# EAGLE board KramerMC_BUS_ferryTALE2022_v1.0 (EAGLE 6.6.0)
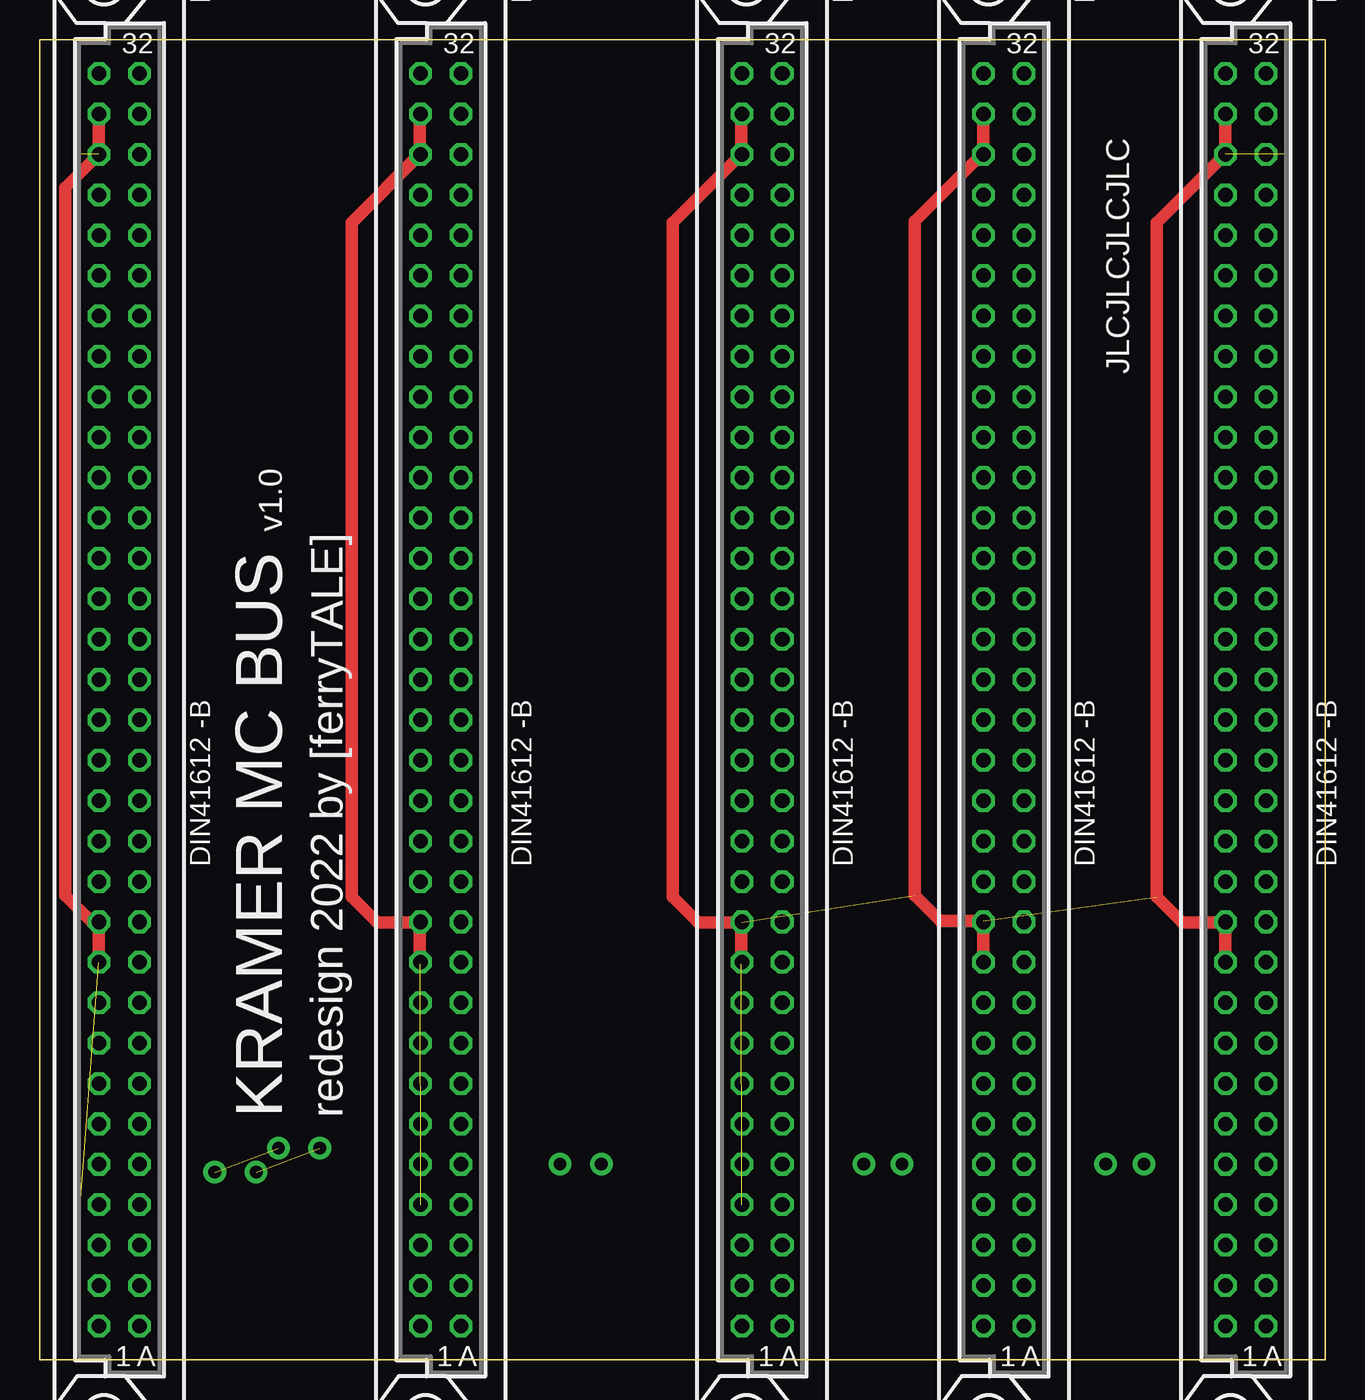
[diagram p0: board, top side]
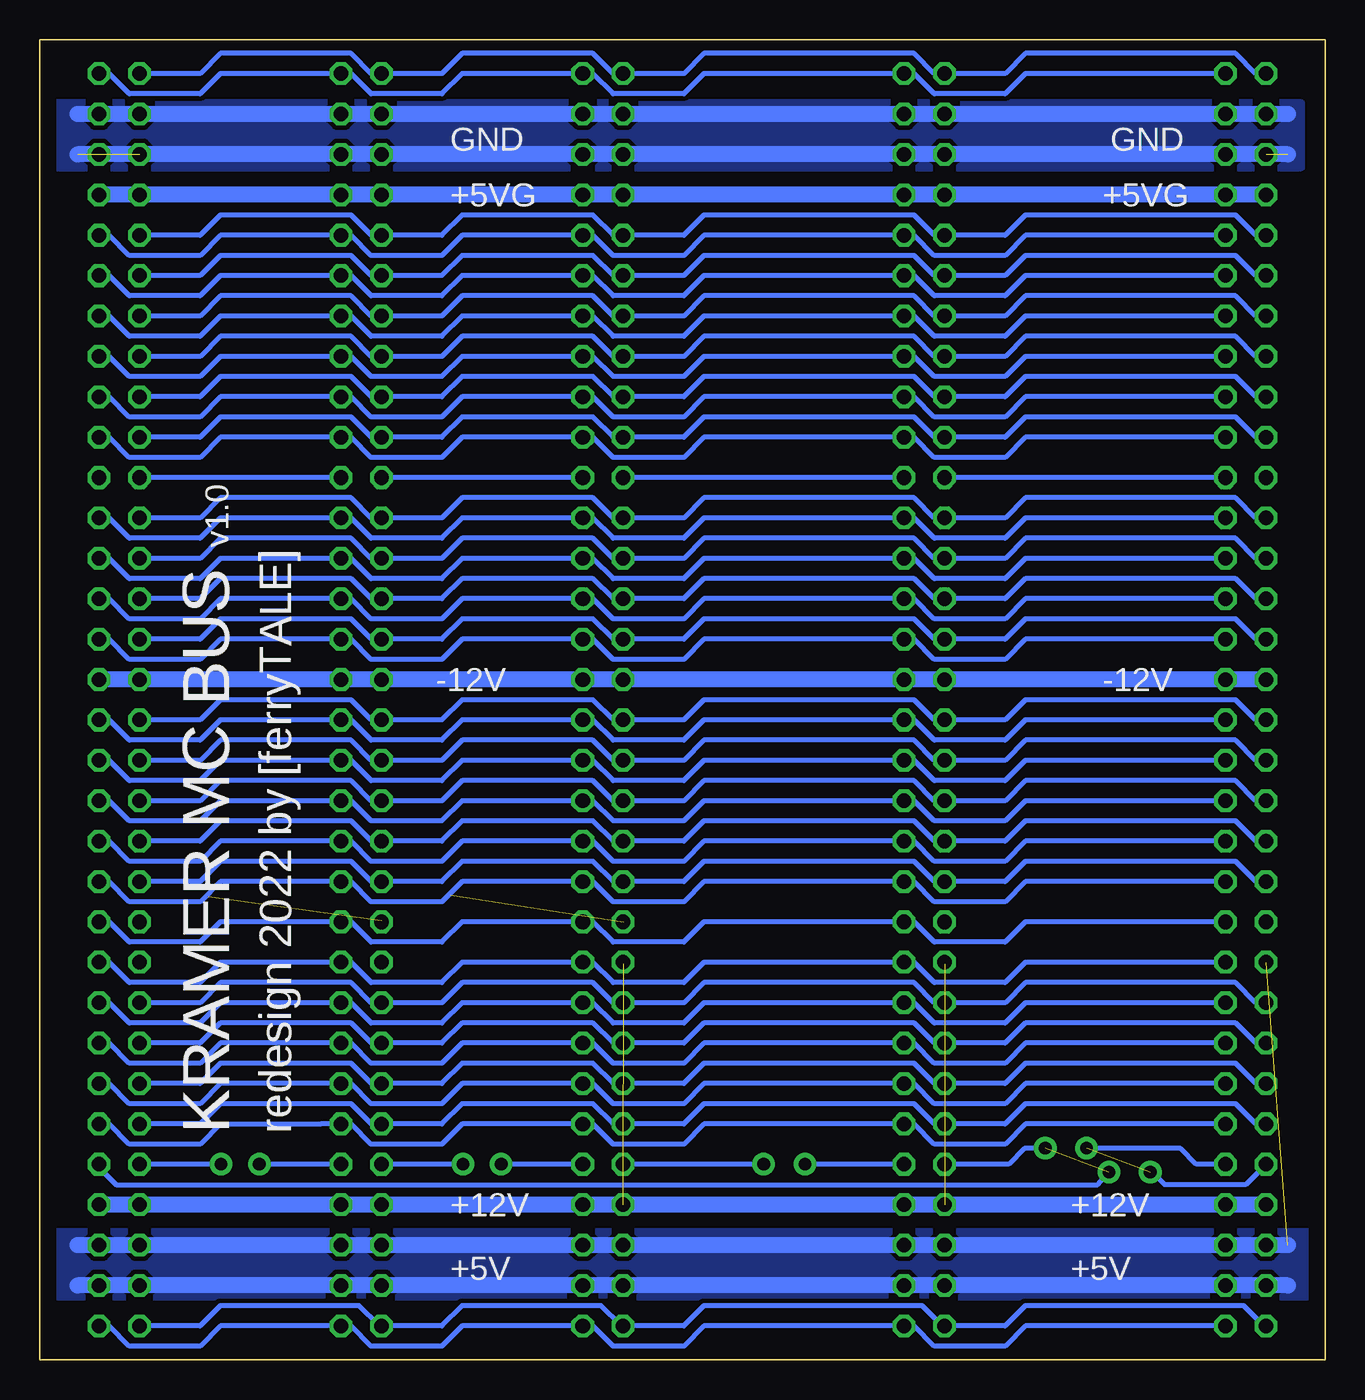
[diagram p1: board, bottom side, seen from below]

Size 80.8 x 83 mm. Coordinates in mm from the lower left corner, seen from the top.
Outline: 0,0 80.8,0 80.8,83 0,83 0,0
Copper layers (1*16): Top 0.035mm / dielectric 1.5mm / Bottom 0.035mm
Design rules "default *": minimum track width 10mil, minimum drill 24mil, track to track 8mil, track to pad 8mil, pad to pad 8mil, via to via 8mil, smd to smd 8mil, copper to edge 40mil, drill to drill 8mil, minimum pad ring 10mil, minimum via ring 8mil, stop-mask expansion 4mil, vias tented up to drill 0mil, thermal gap 10mil

## Footprints (pad centres in the part's own frame; a part is rotated, then mirrored left to right if it is on the bottom)
FAB64S-NOHOLE = drill 0.914 octagon: A1 39.37,1.27; A2 36.83,1.27; A3 34.29,1.27; A4 31.75,1.27; A5 29.21,1.27; A6 26.67,1.27; A7 24.13,1.27; A8 21.59,1.27; A9 19.05,1.27; A10 16.51,1.27; A11 13.97,1.27; A12 11.43,1.27; A13 8.89,1.27; A14 6.35,1.27; A15 3.81,1.27; A16 1.27,1.27; A17 -1.27,1.27; A18 -3.81,1.27; A19 -6.35,1.27; A20 -8.89,1.27; A21 -11.43,1.27; A22 -13.97,1.27; A23 -16.51,1.27; A24 -19.05,1.27; A25 -21.59,1.27; A26 -24.13,1.27; A27 -26.67,1.27; A28 -29.21,1.27; A29 -31.75,1.27; A30 -34.29,1.27; A31 -36.83,1.27; A32 -39.37,1.27; B1 39.37,-1.27; B2 36.83,-1.27; B3 34.29,-1.27; B4 31.75,-1.27; B5 29.21,-1.27; B6 26.67,-1.27; B7 24.13,-1.27; B8 21.59,-1.27; B9 19.05,-1.27; B10 16.51,-1.27; B11 13.97,-1.27; B12 11.43,-1.27; B13 8.89,-1.27; B14 6.35,-1.27; B15 3.81,-1.27; B16 1.27,-1.27; B17 -1.27,-1.27; B18 -3.81,-1.27; B19 -6.35,-1.27; B20 -8.89,-1.27; B21 -11.43,-1.27; B22 -13.97,-1.27; B23 -16.51,-1.27; B24 -19.05,-1.27; B25 -21.59,-1.27; B26 -24.13,-1.27; B27 -26.67,-1.27; B28 -29.21,-1.27; B29 -31.75,-1.27; B30 -34.29,-1.27; B31 -36.83,-1.27; B32 -39.37,-1.27

## Placement (x,y rotation side)
E$1  [FAB64S-NOHOLE]  5,41.5 270 top
E$2  [FAB64S-NOHOLE]  25.2,41.5 270 top
E$3  [FAB64S-NOHOLE]  45.4,41.5 270 top
E$4  [FAB64S-NOHOLE]  60.6,41.5 270 top
E$5  [FAB64S-NOHOLE]  75.8,41.5 270 top

## Library data of the parts
E$1-E$5 = ferry_Kramer_KC

## Tracks (layer width: path | path; a pad name or v marks a point on that pad's centre or on a via)
-12V
  Bottom 1: 3.73,42.77 23.93,42.77
GND  (7 unrouted)
  Top 0.8: 3.7,25 3.7,27.5 3.3,27.5 1.6,29.2 1.6,73.7 3.7,75.8 3.7,78.3 | 23.9,24.9 23.9,27.5 21.2,27.5 19.6,29.1 19.6,71.5 23.9,75.8 23.9,78.3 | 44.1,24.9 44.1,27.5 41.4,27.5 39.8,29.1 39.8,71.5 44.1,75.8 44.1,78.3 | 59.3,25 59.3,27.6 56.6,27.6 55,29.2 55,71.6 59.3,75.9 59.3,78.4 | 74.5,24.9 74.5,27.5 71.8,27.5 70.2,29.1 70.2,71.5 74.5,75.8 74.5,78.3
  Bottom 1: 23.93,9.75 44.13,9.75 | 2.34,7.21 78.42,7.21 | 2.34,4.67 78.42,4.67 | 2.34,78.33 78.42,78.33 | 2.34,75.79 78.42,75.79
  pour Bottom (isolate 0.3, rank 6, no thermals): 1.5,79 80,79 80,75 1.5,75
  pour Bottom (isolate 0.3, rank 6, no thermals): 1,8 80,8 80,4 1,4
S$1
  Bottom 1: 3.73,73.25 23.93,73.25
S$2
  Bottom 1: 3.73,9.75 23.93,9.75
S$3
  Bottom 0.3: 6.27,55.47 23.93,55.47
S$4
  Bottom 0.3: 3.73,80.87 4.37,80.87 5.63,82.14 18.85,82.14 20.12,80.87 23.93,80.87
S$6
  Bottom 0.3: 3.73,70.71 4.37,70.71 5.63,71.98 18.85,71.98 20.12,70.71 23.93,70.71
S$7
  Bottom 0.3: 26.47,70.71 25.84,70.71 24.57,69.44 20.12,69.44 18.85,70.71 6.27,70.71
S$8
  Bottom 0.3: 3.73,68.17 4.37,68.17 5.63,69.44 18.85,69.44 20.12,68.17 23.93,68.17
S$9
  Bottom 0.3: 26.47,68.17 25.84,68.17 24.57,66.9 20.12,66.9 18.85,68.17 6.27,68.17
S$10
  Bottom 0.3: 3.73,65.63 4.37,65.63 5.63,66.9 18.85,66.9 20.12,65.63 23.93,65.63
S$11
  Bottom 0.3: 26.47,65.63 25.84,65.63 24.57,64.36 20.12,64.36 18.85,65.63 6.27,65.63
S$12
  Bottom 0.3: 3.73,63.09 4.37,63.09 5.63,64.36 18.85,64.36 20.12,63.09 23.93,63.09
S$13
  Bottom 0.3: 26.47,63.09 25.84,63.09 24.57,61.82 20.12,61.82 18.85,63.09 6.27,63.09
S$14
  Bottom 0.3: 3.73,60.55 4.37,60.55 5.63,61.82 18.85,61.82 20.12,60.55 23.93,60.55
S$15
  Bottom 0.3: 26.47,60.55 25.84,60.55 24.57,59.28 20.12,59.28 18.85,60.55 6.27,60.55
S$16
  Bottom 0.3: 3.73,58.01 4.37,58.01 5.63,59.28 18.85,59.28 20.12,58.01 23.93,58.01
S$17
  Bottom 0.3: 26.47,58.01 25.84,58.01 24.57,56.74 20.12,56.74 18.85,58.01 6.27,58.01
S$18
  Bottom 0.3: 3.73,52.93 4.37,52.93 5.63,54.2 18.85,54.2 20.12,52.93 23.93,52.93
S$19
  Bottom 0.3: 26.47,52.93 25.84,52.93 24.57,51.66 20.12,51.66 18.85,52.93 6.27,52.93
S$20
  Bottom 0.3: 3.73,50.39 4.37,50.39 5.63,51.66 18.85,51.66 20.12,50.39 23.93,50.39
S$21
  Bottom 0.3: 26.47,50.39 25.84,50.39 24.57,49.12 20.12,49.12 18.85,50.39 6.27,50.39
S$22
  Bottom 0.3: 3.73,47.85 4.37,47.85 5.63,49.12 18.85,49.12 20.12,47.85 23.93,47.85
S$23
  Bottom 0.3: 26.47,47.85 25.84,47.85 24.57,46.58 20.12,46.58 18.85,47.85 6.27,47.85
S$24
  Bottom 0.3: 3.73,45.31 4.37,45.31 5.63,46.58 18.85,46.58 20.12,45.31 23.93,45.31
S$25
  Bottom 0.3: 26.47,45.31 25.84,45.31 24.57,44.04 20.12,44.04 18.85,45.31 6.27,45.31
S$28
  Bottom 0.3: 3.73,40.23 4.37,40.23 5.63,41.5 18.85,41.5 20.12,40.23 23.93,40.23
S$29
  Bottom 0.3: 26.47,40.23 25.84,40.23 24.57,38.96 20.12,38.96 18.85,40.23 6.27,40.23
S$30
  Bottom 0.3: 3.73,37.69 4.37,37.69 5.63,38.96 18.85,38.96 20.12,37.69 23.93,37.69
S$31
  Bottom 0.3: 26.47,37.69 25.84,37.69 24.57,36.42 20.12,36.42 18.85,37.69 6.27,37.69
S$32
  Bottom 0.3: 3.73,35.15 4.37,35.15 5.63,36.42 18.85,36.42 20.12,35.15 23.93,35.15
S$33
  Bottom 0.3: 26.47,35.15 25.84,35.15 24.57,33.88 20.12,33.88 18.85,35.15 6.27,35.15
S$34
  Bottom 0.3: 3.73,32.61 4.37,32.61 5.63,33.88 18.85,33.88 20.12,32.61 23.93,32.61
S$35
  Bottom 0.3: 26.47,32.61 25.84,32.61 24.57,31.34 20.12,31.34 18.85,32.61 6.27,32.61
S$36
  Bottom 0.3: 3.73,30.07 4.37,30.07 5.63,31.34 18.85,31.34 20.12,30.07 23.93,30.07
S$37
  Bottom 0.3: 26.47,30.07 25.84,30.07 24.57,28.8 20.12,28.8 18.85,30.07 6.27,30.07
S$38
  Bottom 0.3: 3.73,22.45 4.37,22.45 5.63,23.72 18.85,23.72 20.12,22.45 23.93,22.45
S$39
  Bottom 0.3: 26.47,27.53 25.84,27.53 24.57,26.26 20.12,26.26 18.85,27.53 6.27,27.53
S$40
  Bottom 1: 23.93,73.25 44.13,73.25
S$41
  Bottom 0.3: 26.47,24.99 25.84,24.99 24.57,23.72 20.12,23.72 18.85,24.99 6.27,24.99
S$42
  Bottom 0.3: 6.27,12.29 8.1,12.3 9.09,13.29 15,13.29
S$43
  Bottom 0.3: 26.47,22.45 25.84,22.45 24.57,21.18 20.12,21.18 18.85,22.45 6.27,22.45
S$44
  Bottom 0.3: 3.73,19.91 4.37,19.91 5.63,21.18 18.85,21.18 20.12,19.91 23.93,19.91
S$45
  Bottom 0.3: 26.47,19.91 25.84,19.91 24.57,18.64 20.12,18.64 18.85,19.91 6.27,19.91
S$46
  Bottom 0.3: 3.73,17.37 4.37,17.37 5.63,18.64 18.85,18.64 20.12,17.37 23.93,17.37
S$47
  Bottom 0.3: 26.47,17.37 25.84,17.37 24.57,16.1 20.12,16.1 18.85,17.37 6.27,17.37
S$48
  Bottom 0.3: 3.73,14.83 4.37,14.83 5.63,16.1 18.85,16.1 20.12,14.83 23.93,14.83
S$49
  Bottom 0.3: 26.47,14.83 25.84,14.83 24.57,13.56 20.12,13.56 18.85,14.83 6.27,14.83
S$50
  Bottom 0.3: 26.47,55.47 44.13,55.47
S$53
  Bottom 0.3: 23.93,70.71 24.57,70.71 25.84,71.98 39.05,71.98 40.32,70.71 44.13,70.71
S$54
  Bottom 0.3: 46.67,70.71 46.03,70.71 44.77,69.44 40.32,69.44 39.05,70.71 26.47,70.71
S$55
  Bottom 0.3: 23.93,68.17 24.57,68.17 25.84,69.44 39.05,69.44 40.32,68.17 44.13,68.17
S$56
  Bottom 0.3: 46.67,68.17 46.03,68.17 44.77,66.9 40.32,66.9 39.05,68.17 26.47,68.17
S$57
  Bottom 0.3: 23.93,65.63 24.57,65.63 25.84,66.9 39.05,66.9 40.32,65.63 44.13,65.63
S$58
  Bottom 0.3: 46.67,65.63 46.03,65.63 44.77,64.36 40.32,64.36 39.05,65.63 26.47,65.63
S$59
  Bottom 0.3: 23.93,63.09 24.57,63.09 25.84,64.36 39.05,64.36 40.32,63.09 44.13,63.09
S$60
  Bottom 0.3: 46.67,63.09 46.03,63.09 44.77,61.82 40.32,61.82 39.05,63.09 26.47,63.09
S$61
  Bottom 0.3: 23.93,60.55 24.57,60.55 25.84,61.82 39.05,61.82 40.32,60.55 44.13,60.55
S$62
  Bottom 0.3: 46.67,60.55 46.03,60.55 44.77,59.28 40.32,59.28 39.05,60.55 26.47,60.55
S$63
  Bottom 0.3: 23.93,58.01 24.57,58.01 25.84,59.28 39.05,59.28 40.32,58.01 44.13,58.01
S$64
  Bottom 0.3: 46.67,58.01 46.03,58.01 44.77,56.74 40.32,56.74 39.05,58.01 26.47,58.01
S$65
  Bottom 0.3: 23.93,52.93 24.57,52.93 25.84,54.2 39.05,54.2 40.32,52.93 44.13,52.93
S$66
  Bottom 0.3: 46.67,52.93 46.03,52.93 44.77,51.66 40.32,51.66 39.05,52.93 26.47,52.93
S$67
  Bottom 0.3: 23.93,50.39 24.57,50.39 25.84,51.66 39.05,51.66 40.32,50.39 44.13,50.39
S$68
  Bottom 0.3: 46.67,50.39 46.03,50.39 44.77,49.12 40.32,49.12 39.05,50.39 26.47,50.39
S$69
  Bottom 0.3: 23.93,47.85 24.57,47.85 25.84,49.12 39.05,49.12 40.32,47.85 44.13,47.85
S$70
  Bottom 0.3: 46.67,47.85 46.03,47.85 44.77,46.58 40.32,46.58 39.05,47.85 26.47,47.85
S$71
  Bottom 0.3: 23.93,45.31 24.57,45.31 25.84,46.58 39.05,46.58 40.32,45.31 44.13,45.31
S$72
  Bottom 0.3: 46.67,45.31 46.03,45.31 44.77,44.04 40.32,44.04 39.05,45.31 26.47,45.31
S$75
  Bottom 0.3: 23.93,40.23 24.57,40.23 25.84,41.5 39.05,41.5 40.32,40.23 44.13,40.23
S$76
  Bottom 0.3: 46.67,40.23 46.03,40.23 44.77,38.96 40.32,38.96 39.05,40.23 26.47,40.23
S$77
  Bottom 0.3: 23.93,37.69 24.57,37.69 25.84,38.96 39.05,38.96 40.32,37.69 44.13,37.69
S$78
  Bottom 0.3: 46.67,37.69 46.03,37.69 44.77,36.42 40.32,36.42 39.05,37.69 26.47,37.69
S$79
  Bottom 0.3: 23.93,35.15 24.57,35.15 25.84,36.42 39.05,36.42 40.32,35.15 44.13,35.15
S$80
  Bottom 0.3: 46.67,35.15 46.03,35.15 44.77,33.88 40.32,33.88 39.05,35.15 26.47,35.15
S$81
  Bottom 0.3: 23.93,32.61 24.57,32.61 25.84,33.88 39.05,33.88 40.32,32.61 44.13,32.61
S$82
  Bottom 0.3: 46.67,32.61 46.03,32.61 44.77,31.34 40.32,31.34 39.05,32.61 26.47,32.61
S$83
  Bottom 0.3: 23.93,30.07 24.57,30.07 25.84,31.34 39.05,31.34 40.32,30.07 44.13,30.07
S$84
  Bottom 0.3: 46.67,30.07 46.03,30.07 44.77,28.8 40.32,28.8 39.05,30.07 26.47,30.07
S$85
  Bottom 0.3: 23.93,22.45 24.57,22.45 25.84,23.72 39.05,23.72 40.32,22.45 44.13,22.45
S$86
  Bottom 0.3: 46.67,27.53 46.03,27.53 44.77,26.26 40.32,26.26 39.05,27.53 26.47,27.53
S$87
  Bottom 0.3: 46.67,24.99 46.03,24.99 44.77,23.72 40.32,23.72 39.05,24.99 26.47,24.99
S$88
  Bottom 0.3: 46.67,22.45 46.03,22.45 44.77,21.18 40.32,21.18 39.05,22.45 26.47,22.45
S$89
  Bottom 0.3: 23.93,19.91 24.57,19.91 25.84,21.18 39.05,21.18 40.32,19.91 44.13,19.91
S$90
  Bottom 0.3: 46.67,19.91 46.03,19.91 44.77,18.64 40.32,18.64 39.05,19.91 26.47,19.91
S$91
  Bottom 0.3: 23.93,17.37 24.57,17.37 25.84,18.64 39.05,18.64 40.32,17.37 44.13,17.37
S$92
  Bottom 0.3: 46.67,17.37 46.03,17.37 44.77,16.1 40.32,16.1 39.05,17.37 26.47,17.37
S$93
  Bottom 0.3: 23.93,14.83 24.57,14.83 25.84,16.1 39.05,16.1 40.32,14.83 44.13,14.83
S$94
  Bottom 0.3: 46.67,14.83 46.03,14.83 44.77,13.56 40.32,13.56 39.05,14.83 26.47,14.83
S$95
  Bottom 1: 44.13,73.25 59.33,73.25
S$96
  Bottom 1: 44.13,9.75 59.33,9.75
S$97
  Bottom 0.3: 46.67,55.47 59.33,55.47
S$100
  Bottom 0.3: 44.13,70.71 44.77,70.71 46.03,71.98 54.25,71.98 55.52,70.71 59.33,70.71
S$101
  Bottom 0.3: 61.87,70.71 61.23,70.71 59.97,69.44 55.52,69.44 54.25,70.71 46.67,70.71
S$102
  Bottom 0.3: 44.13,68.17 44.77,68.17 46.03,69.44 54.25,69.44 55.52,68.17 59.33,68.17
S$103
  Bottom 0.3: 61.87,68.17 61.23,68.17 59.97,66.9 55.52,66.9 54.25,68.17 46.67,68.17
S$104
  Bottom 0.3: 44.13,65.63 44.77,65.63 46.03,66.9 54.25,66.9 55.52,65.63 59.33,65.63
S$105
  Bottom 0.3: 61.87,65.63 61.23,65.63 59.97,64.36 55.52,64.36 54.25,65.63 46.67,65.63
S$106
  Bottom 0.3: 44.13,63.09 44.77,63.09 46.03,64.36 54.25,64.36 55.52,63.09 59.33,63.09
S$107
  Bottom 0.3: 61.87,63.09 61.23,63.09 59.97,61.82 55.52,61.82 54.25,63.09 46.67,63.09
S$108
  Bottom 0.3: 44.13,60.55 44.77,60.55 46.03,61.82 54.25,61.82 55.52,60.55 59.33,60.55
S$109
  Bottom 0.3: 61.87,60.55 61.23,60.55 59.97,59.28 55.52,59.28 54.25,60.55 46.67,60.55
S$110
  Bottom 0.3: 44.13,58.01 44.77,58.01 46.03,59.28 54.25,59.28 55.52,58.01 59.33,58.01
S$111
  Bottom 0.3: 61.87,58.01 61.23,58.01 59.97,56.74 55.52,56.74 54.25,58.01 46.67,58.01
S$112
  Bottom 0.3: 44.13,52.93 44.77,52.93 46.03,54.2 54.25,54.2 55.52,52.93 59.33,52.93
S$113
  Bottom 0.3: 61.87,52.93 61.23,52.93 59.97,51.66 55.52,51.66 54.25,52.93 46.67,52.93
S$114
  Bottom 0.3: 44.13,50.39 44.77,50.39 46.03,51.66 54.25,51.66 55.52,50.39 59.33,50.39
S$115
  Bottom 0.3: 61.87,50.39 61.23,50.39 59.97,49.12 55.52,49.12 54.25,50.39 46.67,50.39
S$116
  Bottom 0.3: 44.13,47.85 44.77,47.85 46.03,49.12 54.25,49.12 55.52,47.85 59.33,47.85
S$117
  Bottom 0.3: 61.87,47.85 61.23,47.85 59.97,46.58 55.52,46.58 54.25,47.85 46.67,47.85
S$118
  Bottom 0.3: 44.13,45.31 44.77,45.31 46.03,46.58 54.25,46.58 55.52,45.31 59.33,45.31
S$119
  Bottom 0.3: 61.87,45.31 61.23,45.31 59.97,44.04 55.52,44.04 54.25,45.31 46.67,45.31
S$122
  Bottom 0.3: 44.13,40.23 44.77,40.23 46.03,41.5 54.25,41.5 55.52,40.23 59.33,40.23
S$123
  Bottom 0.3: 61.87,40.23 61.23,40.23 59.97,38.96 55.52,38.96 54.25,40.23 46.67,40.23
S$124
  Bottom 0.3: 44.13,37.69 44.77,37.69 46.03,38.96 54.25,38.96 55.52,37.69 59.33,37.69
S$125
  Bottom 0.3: 61.87,37.69 61.23,37.69 59.97,36.42 55.52,36.42 54.25,37.69 46.67,37.69
S$126
  Bottom 0.3: 44.13,35.15 44.77,35.15 46.03,36.42 54.25,36.42 55.52,35.15 59.33,35.15
S$127
  Bottom 0.3: 61.87,35.15 61.23,35.15 59.97,33.88 55.52,33.88 54.25,35.15 46.67,35.15
S$128
  Bottom 0.3: 44.13,32.61 44.77,32.61 46.03,33.88 54.25,33.88 55.52,32.61 59.33,32.61
S$129
  Bottom 0.3: 61.87,32.61 61.23,32.61 59.97,31.34 55.52,31.34 54.25,32.61 46.67,32.61
S$130
  Bottom 0.3: 44.13,30.07 44.77,30.07 46.03,31.34 54.25,31.34 55.52,30.07 59.33,30.07
S$131
  Bottom 0.3: 61.87,30.07 61.23,30.07 59.97,28.8 55.52,28.8 54.25,30.07 46.67,30.07
S$132
  Bottom 0.3: 44.13,22.45 44.77,22.45 46.03,23.72 54.25,23.72 55.52,22.45 59.33,22.45
S$133
  Bottom 0.3: 61.87,27.53 61.23,27.53 59.97,26.26 55.52,26.26 54.25,27.53 46.67,27.53
S$134
  Bottom 0.3: 61.87,24.99 61.23,24.99 59.97,23.72 55.52,23.72 54.25,24.99 46.67,24.99
S$135
  Bottom 0.3: 61.87,22.45 61.23,22.45 59.97,21.18 55.52,21.18 54.25,22.45 46.67,22.45
S$136
  Bottom 0.3: 44.13,19.91 44.77,19.91 46.03,21.18 54.25,21.18 55.52,19.91 59.33,19.91
S$137
  Bottom 0.3: 61.87,19.91 61.23,19.91 59.97,18.64 55.52,18.64 54.25,19.91 46.67,19.91
S$138
  Bottom 0.3: 44.13,17.37 44.77,17.37 46.03,18.64 54.25,18.64 55.52,17.37 59.33,17.37
S$139
  Bottom 0.3: 61.87,17.37 61.23,17.37 59.97,16.1 55.52,16.1 54.25,17.37 46.67,17.37
S$140
  Bottom 0.3: 44.13,14.83 44.77,14.83 46.03,16.1 54.25,16.1 55.52,14.83 59.33,14.83
S$141
  Bottom 0.3: 61.87,14.83 61.23,14.83 59.97,13.56 55.52,13.56 54.25,14.83 46.67,14.83
S$142
  Bottom 1: 59.33,73.25 77.13,73.25
S$143
  Bottom 1: 59.33,9.75 77.13,9.75
S$144
  Bottom 0.3: 61.87,55.47 74.53,55.47
S$147
  Bottom 0.3: 59.33,70.71 59.97,70.71 61.23,71.98 69.45,71.98 70.72,70.71 74.53,70.71
S$148
  Bottom 0.3: 77.07,70.71 76.44,70.71 75.17,69.44 70.72,69.44 69.45,70.71 61.87,70.71
S$149
  Bottom 0.3: 59.33,68.17 59.97,68.17 61.23,69.44 69.45,69.44 70.72,68.17 74.53,68.17
S$150
  Bottom 0.3: 77.07,68.17 76.44,68.17 75.17,66.9 70.72,66.9 69.45,68.17 61.87,68.17
S$151
  Bottom 0.3: 59.33,65.63 59.97,65.63 61.23,66.9 69.45,66.9 70.72,65.63 74.53,65.63
S$152
  Bottom 0.3: 77.07,65.63 76.44,65.63 75.17,64.36 70.72,64.36 69.45,65.63 61.87,65.63
S$153
  Bottom 0.3: 59.33,63.09 59.97,63.09 61.23,64.36 69.45,64.36 70.72,63.09 74.53,63.09
S$154
  Bottom 0.3: 77.07,63.09 76.44,63.09 75.17,61.82 70.72,61.82 69.45,63.09 61.87,63.09
S$155
  Bottom 0.3: 59.33,60.55 59.97,60.55 61.23,61.82 69.45,61.82 70.72,60.55 74.53,60.55
S$156
  Bottom 0.3: 77.07,60.55 76.44,60.55 75.17,59.28 70.72,59.28 69.45,60.55 61.87,60.55
S$157
  Bottom 0.3: 59.33,58.01 59.97,58.01 61.23,59.28 69.45,59.28 70.72,58.01 74.53,58.01
S$158
  Bottom 0.3: 77.07,58.01 76.44,58.01 75.17,56.74 70.72,56.74 69.45,58.01 61.87,58.01
S$159
  Bottom 0.3: 59.33,52.93 59.97,52.93 61.23,54.2 69.45,54.2 70.72,52.93 74.53,52.93
S$160
  Bottom 0.3: 77.07,52.93 76.44,52.93 75.17,51.66 70.72,51.66 69.45,52.93 61.87,52.93
S$161
  Bottom 0.3: 59.33,50.39 59.97,50.39 61.23,51.66 69.45,51.66 70.72,50.39 74.53,50.39
S$162
  Bottom 0.3: 77.07,50.39 76.44,50.39 75.17,49.12 70.72,49.12 69.45,50.39 61.87,50.39
S$163
  Bottom 0.3: 59.33,47.85 59.97,47.85 61.23,49.12 69.45,49.12 70.72,47.85 74.53,47.85
S$164
  Bottom 0.3: 77.07,47.85 76.44,47.85 75.17,46.58 70.72,46.58 69.45,47.85 61.87,47.85
S$165
  Bottom 0.3: 59.33,45.31 59.97,45.31 61.23,46.58 69.45,46.58 70.72,45.31 74.53,45.31
S$166
  Bottom 0.3: 77.07,45.31 76.44,45.31 75.17,44.04 70.72,44.04 69.45,45.31 61.87,45.31
S$169
  Bottom 0.3: 59.33,40.23 59.97,40.23 61.23,41.5 69.45,41.5 70.72,40.23 74.53,40.23
S$170
  Bottom 0.3: 77.07,40.23 76.44,40.23 75.17,38.96 70.72,38.96 69.45,40.23 61.87,40.23
S$171
  Bottom 0.3: 59.33,37.69 59.97,37.69 61.23,38.96 69.45,38.96 70.72,37.69 74.53,37.69
S$172
  Bottom 0.3: 77.07,37.69 76.44,37.69 75.17,36.42 70.72,36.42 69.45,37.69 61.87,37.69
S$173
  Bottom 0.3: 59.33,35.15 59.97,35.15 61.23,36.42 69.45,36.42 70.72,35.15 74.53,35.15
S$174
  Bottom 0.3: 77.07,35.15 76.44,35.15 75.17,33.88 70.72,33.88 69.45,35.15 61.87,35.15
S$175
  Bottom 0.3: 59.33,32.61 59.97,32.61 61.23,33.88 69.45,33.88 70.72,32.61 74.53,32.61
S$176
  Bottom 0.3: 77.07,32.61 76.44,32.61 75.17,31.34 70.72,31.34 69.45,32.61 61.87,32.61
S$177
  Bottom 0.3: 59.33,30.07 59.97,30.07 61.23,31.34 69.45,31.34 70.72,30.07 74.53,30.07
S$178
  Bottom 0.3: 77.07,30.07 76.44,30.07 75.17,28.8 70.72,28.8 69.45,30.07 61.87,30.07
S$179
  Bottom 0.3: 59.33,22.45 59.97,22.45 61.23,23.72 69.45,23.72 70.72,22.45 74.53,22.45
S$180
  Bottom 0.3: 77.07,27.53 76.44,27.53 75.17,26.26 70.72,26.26 69.45,27.53 61.87,27.53
S$181
  Bottom 0.3: 77.07,24.99 76.44,24.99 75.17,23.72 70.72,23.72 69.45,24.99 61.87,24.99
S$182
  Bottom 0.3: 77.07,22.45 76.44,22.45 75.17,21.18 70.72,21.18 69.45,22.45 61.87,22.45
S$183
  Bottom 0.3: 59.33,19.91 59.97,19.91 61.23,21.18 69.45,21.18 70.72,19.91 74.53,19.91
S$184
  Bottom 0.3: 77.07,19.91 76.44,19.91 75.17,18.64 70.72,18.64 69.45,19.91 61.87,19.91
S$185
  Bottom 0.3: 59.33,17.37 59.97,17.37 61.23,18.64 69.45,18.64 70.72,17.37 74.53,17.37
S$186
  Bottom 0.3: 77.07,17.37 76.44,17.37 75.17,16.1 70.72,16.1 69.45,17.37 61.87,17.37
S$187
  Bottom 0.3: 59.33,14.83 59.97,14.83 61.23,16.1 69.45,16.1 70.72,14.83 74.53,14.83
S$188
  Bottom 0.3: 77.07,14.83 76.44,14.83 75.17,13.56 70.72,13.56 69.45,14.83 63.14,14.83 61.87,14.83
S$190
  Bottom 0.3: 26.47,80.87 25.84,80.87 24.57,79.6 20.12,79.6 18.85,80.87 6.27,80.87
S$191
  Bottom 0.3: 3.73,2.13 3.87,2.13 5.13,3.4 18.85,3.4 20.12,2.13 23.93,2.13
S$193
  Bottom 0.3: 23.93,80.87 24.57,80.87 25.84,82.14 39.05,82.14 40.32,80.87 44.13,80.87
S$194
  Bottom 0.3: 46.67,80.87 46.03,80.87 44.77,79.6 40.32,79.6 39.05,80.87 26.47,80.87
S$195
  Bottom 0.3: 26.47,2.13 25.84,2.13 24.57,0.86 20.12,0.86 18.85,2.13 6.27,2.13
S$196
  Bottom 0.3: 44.13,80.87 44.77,80.87 46.03,82.14 54.25,82.14 55.52,80.87 59.33,80.87
S$197
  Bottom 0.3: 61.87,80.87 61.23,80.87 59.97,79.6 55.52,79.6 54.25,80.87 46.67,80.87
S$198
  Bottom 0.3: 26.47,12.29 32.7,12.29
S$200
  Bottom 0.3: 59.33,80.87 59.97,80.87 61.23,82.14 69.45,82.14 70.72,80.87 74.53,80.87
S$201
  Bottom 0.3: 77.07,80.87 76.44,80.87 75.17,79.6 70.72,79.6 69.45,80.87 61.87,80.87
S$202
  Bottom 0.3: 23.93,2.13 24.07,2.13 25.34,3.4 39.05,3.4 40.32,2.13 44.13,2.13
S$204
  Bottom 0.3: 46.67,2.13 46.03,2.13 44.77,0.86 40.32,0.86 39.05,2.13 26.47,2.13
S$205
  Bottom 0.3: 46.67,12.29 51.71,12.29
S$206
  Bottom 0.3: 44.13,2.13 44.27,2.13 45.53,3.4 54.25,3.4 55.52,2.13 59.33,2.13
S$207
  Bottom 0.3: 61.87,2.13 61.23,2.13 59.97,0.86 55.52,0.86 54.25,2.13 46.67,2.13
S$208
  Bottom 0.3: 61.87,12.29 66.91,12.29
S$210
  Bottom 0.3: 59.33,2.13 59.47,2.13 60.73,3.4 69.45,3.4 70.72,2.13 74.53,2.13
S$211
  Bottom 0.3: 77.07,2.13 76.44,2.13 75.17,0.86 70.72,0.86 69.45,2.13 61.87,2.13
S$212
  Bottom 0.3: 17.66,13.29 18.91,13.29 19.9,12.3 23.93,12.29
S$213
  Bottom 0.3: 35.36,12.29 44.13,12.29
S$215
  Bottom 0.3: 54.29,12.29 59.33,12.29
S$216
  Bottom 0.3: 69.49,12.29 74.53,12.29
S$217  (via drill 0.8 pad 1.42)  (1 unrouted)
  other vias: 15,13.3 11,11.8
S$218  (via drill 0.8 pad 1.42)  (1 unrouted)
  other vias: 17.6,13.3 13.6,11.8
S$219  (via drill 0.8 pad 1.42)
  other vias: 32.7,12.3
S$220  (via drill 0.8 pad 1.42)
  other vias: 35.3,12.3
S$221  (via drill 0.8 pad 1.42)
  other vias: 51.8,12.3
S$222  (via drill 0.8 pad 1.42)
  other vias: 54.2,12.3
S$223  (via drill 0.8 pad 1.42)
  other vias: 67,12.3
S$224  (via drill 0.8 pad 1.42)
  other vias: 69.4,12.3
S$226
  Bottom 1: 23.93,42.77 77.15,42.77
S$230
  Bottom 0.3: 77.1,12.3 77.1,12.1 76,11 14.3,11 13.7,11.7
S$231
  Bottom 0.3: 3.7,12.2 3.8,12.2 5,11 10.1,11 10.9,11.8

## Text on the board
tPlace: JLCJLCJLCJLC | v1.0 | KRAMER MC BUS | redesign 2022 by [ferryTALE]
bPlace: GND | GND | +5VG | +5VG | v1.0 | -12V | -12V | redesign 2022 by [ferryTALE] | KRAMER MC BUS | +12V | +12V | +5V | +5V
tValues: Federleiste DIN 41612, 64pin, Bauform B, gerade / reichelt: FL-B 64G4